# EAGLE board Taser gun (EAGLE 9.6.0)
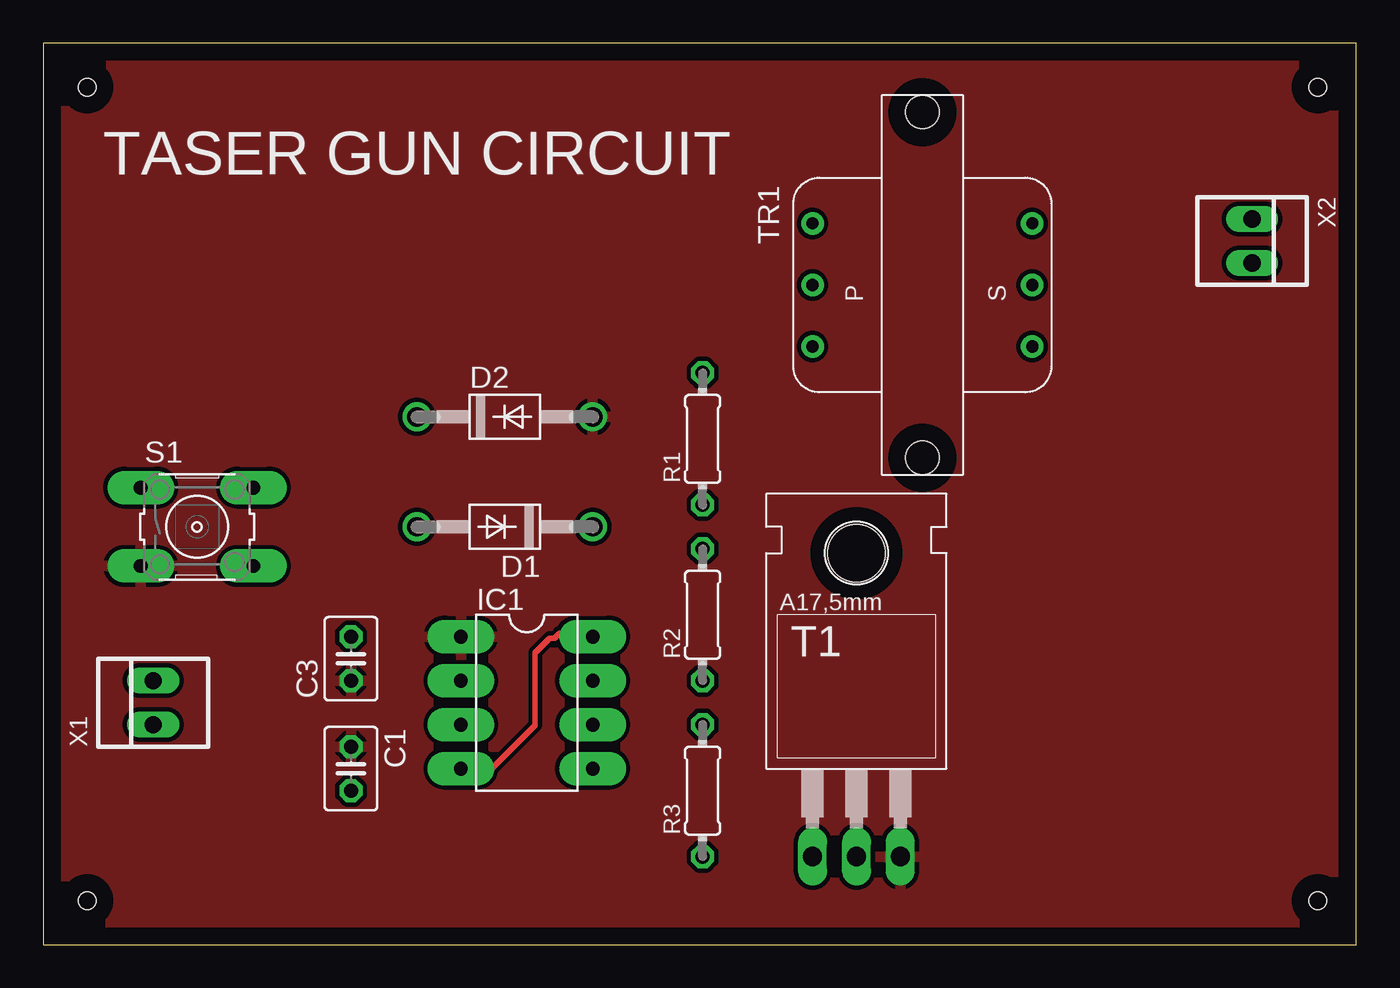
[diagram p0: board, top side]
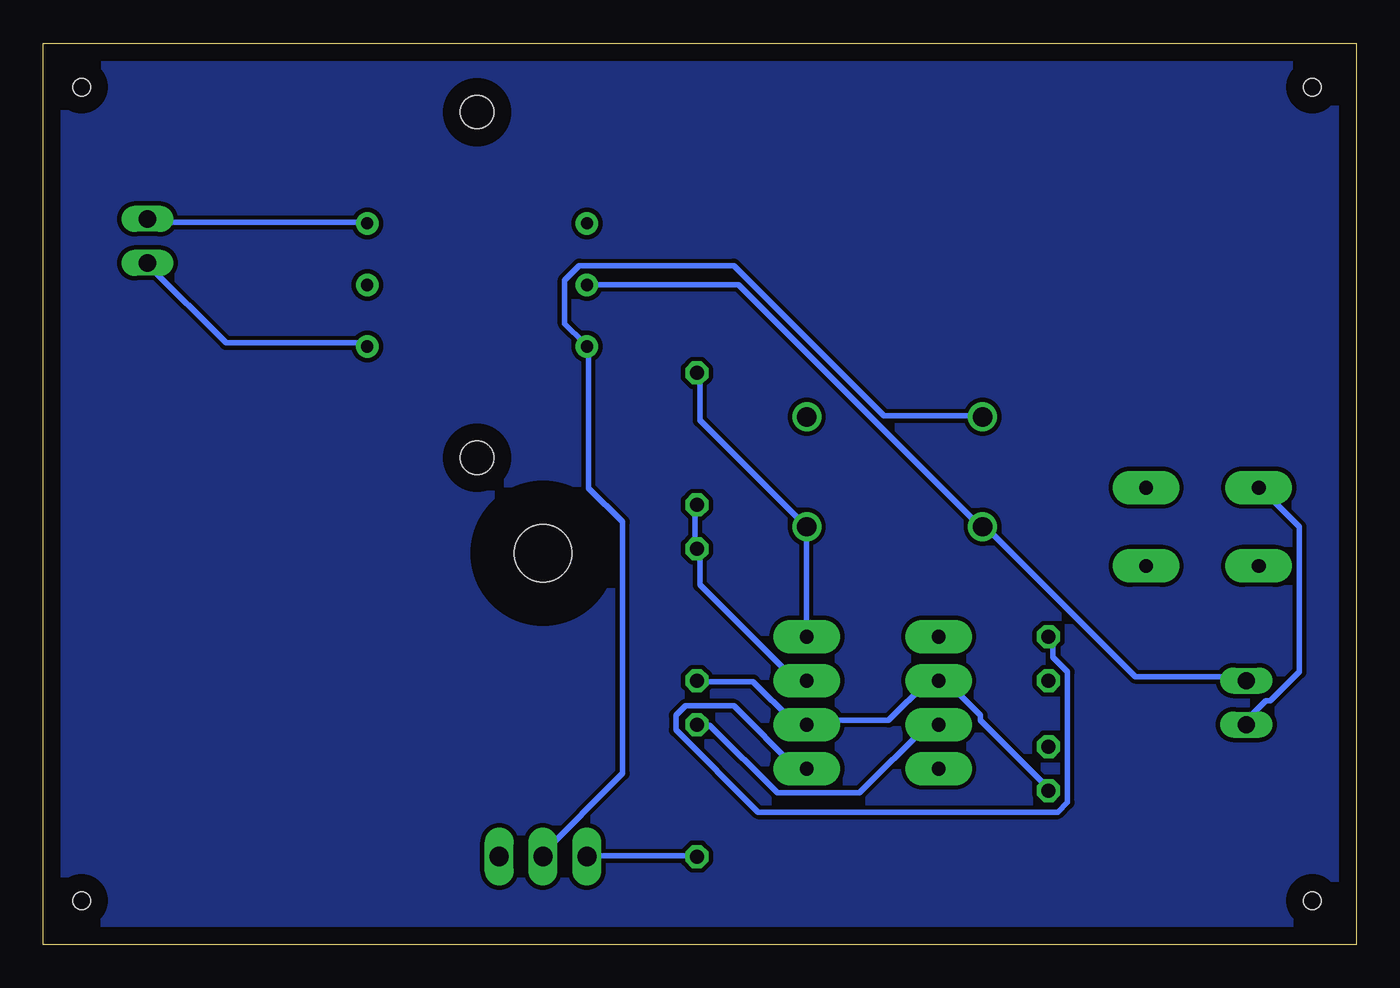
[diagram p1: board, bottom side, seen from below]

Size 75.87 x 52.06 mm. Coordinates in mm from the lower left corner, seen from the top.
Outline: 0,0 75.87,0 75.87,52.06 0,52.06 0,0
Copper layers (1*16): Top 0.035mm / dielectric 1.5mm / Bottom 0.035mm
Design rules "default": minimum track width 6mil, minimum drill 0.35mm, track to track 6mil, track to pad 6mil, pad to pad 6mil, via to via 6mil, smd to smd 6mil, copper to edge 40mil, drill to drill 6mil, minimum pad ring 10mil, minimum via ring 8mil, stop-mask expansion 4mil, vias tented up to drill 0mil, thermal gap 10mil
Net classes: 0 default: width 0.305 mm, drill 0.508 mm, clearance 0.254 mm
Holes 1 mm at 2.54,2.54 73.66,2.54 73.66,49.53 2.54,49.53

## Footprints (pad centres in the part's own frame; a part is rotated, then mirrored left to right if it is on the bottom)
C025-030X050 = drill 0.813 octagon: 1 -1.27,0; 2 1.27,0
DO41-10 = drill 1.118: A 5.08,0; C -5.08,0
DIL-08 = drill 0.8 pad 1.93 long: 1 -3.81,-3.81; 2 -1.27,-3.81; 3 1.27,-3.81; 4 3.81,-3.81; 5 3.81,3.81; 6 1.27,3.81; 7 -1.27,3.81; 8 -3.81,3.81
0204/7 = drill 0.813 octagon: 1 -3.81,0; 2 3.81,0
B3F-10XX = drill 0.8 pad 1.93 long: 1 -3.251,2.261; 2 3.251,2.261; 3 -3.251,-2.261; 4 3.251,-2.261
TO220 = drill 1.118 long: 1 -2.54,-6.35; 2 0,-6.35; 3 2.54,-6.35 | hole 3.302: 0,11.176
42TM = drill 0.7 pad 1.3: 1 -3.556,-6.35; 2 0,-6.35; 3 3.556,-6.35; 4 3.556,6.35; 5 0,6.35; 6 -3.556,6.35 | hole 1.9: -9.982,0; 9.982,0
22-23-2021 = drill 1 long: 1 -1.27,0; 2 1.27,0

## Placement (x,y rotation side)
C1  [C025-030X050]  17.78,10.16 270 top
C3  [C025-030X050]  17.78,16.51 90 top
D1  1N4004  [DO41-10]  26.67,24.13 180 top
D2  1N4004  [DO41-10]  26.67,30.48 0 top
IC1  NE555  [DIL-08]  27.94,13.97 270 top
R1  [0204/7]  38.1,29.21 90 top
R2  [0204/7]  38.1,19.05 90 top
R3  [0204/7]  38.1,8.89 90 top
S1  [B3F-10XX]  8.89,24.13 0 top
T1  TIP31  [TO220]  46.99,11.43 0 top
TR1  42TM113  [42TM]  50.8,38.1 270 top
X1  22-23-2021  [22-23-2021]  6.35,13.97 90 top
X2  22-23-2021  [22-23-2021]  69.85,40.64 270 top

## Library data of the parts
C1 C3 = rcl; SPICEPREFIX: C
D1 D2 = diode
IC1 = st-microelectronics; MF: Arrow Electronics; MPN: NE555N; OC_FARNELL: 1467742; OC_NEWARK: 89K1486
R1-R3 = rcl; SPICEPREFIX: R
S1 = switch-omron; MPN: B3F-1000; OC_FARNELL: 176432; OC_NEWARK: 36M3542
T1 = transistor
TR1 = trafo-xicon; OC_FARNELL: unknown; OC_NEWARK: unknown
X1 X2 = con-molex; MF: MOLEX; MPN: 22-23-2021; OC_FARNELL: 1462926; OC_NEWARK: 25C3832

## Nets
GND: C1.1 C3.1 D2.A IC1.1 S1.3 T1.3
N$1: IC1.7 R1.1 R2.2
N$2: D1.C IC1.4 IC1.8 R1.2
N$3: C1.2 IC1.2 IC1.6 R2.1
N$4: C3.2 IC1.5
N$5: IC1.3 R3.2
N$6: R3.1 T1.1
N$7: D2.C T1.2 TR1.3
N$9: D1.A TR1.2 X1.2
N$10: S1.1 X1.1
N$11: TR1.6 X2.1
N$12: TR1.4 X2.2

## Tracks (layer width: path | path; a pad name or v marks a point on that pad's centre or on a via)
GND
  pour Top: -1.27,53.34 -1.27,-1.27 77.47,-1.27 77.47,53.34
N$1
  Bottom 0.305: R1.1 38.2,25.25 38.2,23.01 R2.2 37.92,22.73 37.92,20.78 32.61,15.47 31.78,15.47 IC1.7
N$2
  Top 0.305: IC1.4 25.91,10.16 28.42,12.67 28.42,16.87 29.26,17.7 29.54,17.7 29.82,17.98 31.5,17.98 IC1.8
  Bottom 0.305: 31.78,24.13 37.92,30.28 37.92,32.79 R1.2 | 31.78,24.13 31.78,17.98 IC1.8 | 31.78,24.13 D1.C
N$3
  Bottom 0.305: R2.1 37.92,15.19 34.85,15.19 32.61,12.95 31.78,12.95 IC1.6 31.5,12.95 27.03,12.95 24.79,15.19 24.23,15.19 IC1.2 23.95,15.47 21.72,13.23 21.72,12.95 17.8,9.04 C1.2
N$4
  Bottom 0.305: IC1.5 32.33,10.16 35.97,13.79 38.76,13.79 39.32,13.23 39.32,12.39 34.57,7.64 17.25,7.64 16.69,8.2 16.69,15.75 17.53,16.59 17.53,17.7 C3.2
N$5
  Bottom 0.305: R3.2 37.92,12.67 37.36,12.67 33.45,8.76 28.7,8.76 24.79,12.67 24.23,12.67 IC1.3
N$6
  Bottom 0.305: R3.1 38.2,5.13 44.35,5.13 T1.1
N$7
  Bottom 0.305: T1.2 47.14,5.13 42.39,9.88 42.39,24.41 44.35,26.37 44.35,34.47 TR1.3 44.63,34.75 45.75,35.87 45.75,38.38 44.91,39.22 35.97,39.22 27.3,30.56 21.72,30.56 D2.C
N$9
  Bottom 0.305: TR1.2 35.69,38.1 21.72,24.13 D1.A 21.44,24.13 12.78,15.47 6.35,15.47 X1.2
N$10
  Bottom 0.305: X1.1 6.35,12.95 5.23,14.07 4.95,14.07 3.28,15.75 3.28,24.13 5.51,26.37 S1.1
N$11
  Bottom 0.305: TR1.6 57.2,41.73 69.77,41.73 X2.1
N$12
  Bottom 0.305: TR1.4 57.2,34.75 65.3,34.75 69.77,39.22 X2.2
VCC
  pour Bottom: 0,52.07 0,0 76.2,0 76.2,52.07

## Text on the board
tPlace: TASER GUN CIRCUIT